# EAGLE board CT_schematic (EAGLE 7.6.0)

Size 100 x 80 mm. Coordinates in mm from the lower left corner, seen from the top.
Outline: 0,0 100,0 100,80 0,80 0,0
Copper layers (1*16): Top 0.035mm / dielectric 1.5mm / Bottom 0.035mm
Design rules "default": minimum track width 10mil, minimum drill 24mil, track to track 8mil, track to pad 8mil, pad to pad 8mil, via to via 8mil, smd to smd 8mil, copper to edge 40mil, drill to drill 8mil, minimum pad ring 10mil, minimum via ring 8mil, stop-mask expansion 4mil, vias tented up to drill 0mil, thermal gap 10mil

## Footprints (pad centres in the part's own frame; a part is rotated, then mirrored left to right if it is on the bottom)
C0603 = smd 0.8 x 0.8: 1 -0.762,0; 2 0.762,0
C0402 = smd 0.5 x 0.5: 1 -0.508,0; 2 0.508,0
C0805 = smd 1.2 x 1.3: 1 -1.016,0; 2 1.016,0
C1206 = smd 1.3 x 1.6: 1 -1.524,0; 2 1.524,0
L0603 = smd 0.8 x 0.8: 1 -0.762,0; 2 0.762,0
DR1040 = smd 1.6 x 3.2: 1 -4.458,0; 2 4.458,0
R0603 = smd 0.8 x 0.8: 1 -0.762,0; 2 0.762,0
WLCSP49 = smd 0.25 x 0.25: A1 -1.2,1.2; A2 -0.8,1.2; A3 -0.4,1.2; A4 0,1.2; A5 0.4,1.2; A6 0.8,1.2; A7 1.2,1.2; B1 -1.2,0.8; B2 -0.8,0.8; B3 -0.4,0.8; B4 0,0.8; B5 0.4,0.8; B6 0.8,0.8; B7 1.2,0.8; C1 -1.2,0.4; C2 -0.8,0.4; C3 -0.4,0.4; C4 0,0.4; C5 0.4,0.4; C6 0.8,0.4; C7 1.2,0.4; D1 -1.2,0; D2 -0.8,0; D3 -0.4,0; D4 0,0; D5 0.4,0; D6 0.8,0; D7 1.2,0; E1 -1.2,-0.4; E2 -0.8,-0.4; E3 -0.4,-0.4; E4 0,-0.4; E5 0.4,-0.4; E6 0.8,-0.4; E7 1.2,-0.4; F1 -1.2,-0.8; F2 -0.8,-0.8; F3 -0.4,-0.8; F4 0,-0.8; F5 0.4,-0.8; F6 0.8,-0.8; F7 1.2,-0.8; G1 -1.2,-1.2; G2 -0.8,-1.2; G3 -0.4,-1.2; G4 0,-1.2; G5 0.4,-1.2; G6 0.8,-1.2; G7 1.2,-1.2
TST-110-05-T-D-RA = drill 1 pad 1.7 square: 1 0,0 | drill 1 pad 1.7: 2 0,2.54; 3 2.54,0; 4 2.54,2.54; 5 5.08,0; 6 5.08,2.54; 7 7.62,0; 8 7.62,2.54; 9 10.16,0; 10 10.16,2.54; 11 12.7,0; 12 12.7,2.54; 13 15.24,0; 14 15.24,2.54; 15 17.78,0; 16 17.78,2.54; 17 20.32,0; 18 20.32,2.54; 19 22.86,0; 20 22.86,2.54
TDFN-8/6MM = smd 0.3 x 0.75: 1 0,0; 2 0.5,0; 3 1,0; 4 1.5,0; 5 1.5,3; 6 1,3; 7 0.5,3; 8 0,3
FCI_10118193-0001LF = smd 0.4 x 1.35: 1 -1.3,2.675; 2 -0.65,2.675; 3 0,2.675; 4 0.65,2.675; 5 1.3,2.675 | smd 1.6 x 1.4: 6 -3.2,2.45; 7 3.2,2.45 | smd 1.9 x 1.9: 8 -1.2,0; 9 1.2,0 | hole 0.5: -3.3,0; 3.3,0
SOT143B = smd 1 x 0.7: 1 -0.75,-1 | smd 0.6 x 0.7: 2 0.95,-1; 3 0.95,1; 4 -0.95,1
ABS07-32.768KHZ-7-T = smd 1.1 x 2.4: 1 -2.5,0; 2 0,0
ASDMB-XX.XXXXMHZ-XX-XX-XXX = smd 0.65 x 0.85: 1 0.45,0.2; 2 2.05,0.2; 3 2.05,1.8; 4 0.45,1.8
TSOT-23-5 = smd 1.3 x 0.62: 1 -1.31,0.95; 2 -1.31,0; 3 -1.31,-0.95; 4 1.31,-0.95; 5 1.31,0.95
DFN8_2X3MC = smd 0.813 x 0.305: 1 -1.398,0.75; 2 -1.398,0.25; 3 -1.398,-0.25; 4 -1.398,-0.75; 5 1.398,-0.75; 6 1.398,-0.25; 7 1.398,0.25; 8 1.398,0.75 | smd 1.753 x 1.549: 9 0,0
JST-2-SMD = smd 1 x 4.6: 1 -1,-3.7; 2 1,-3.7 | smd 1.6 x 3.4: NC1 -3.4,1.5; NC2 3.4,1.5
SON-6 = smd 0.55 x 0.3: 1 -0.355,0.5 | smd 0.52 x 0.3: 2 -0.37,0; 3 -0.37,-0.5; 4 0.37,-0.5; 5 0.37,0; 6 0.37,0.5
SW_4-1437565-2 = smd 1.4 x 2.1: 1 -2.23,4.55; 2 -2.23,-4.55; 3 2.23,4.55; 4 2.23,-4.55
LGM67K-G1J2-24-Z = smd 0.8 x 1.4: A -2,0; C 0,0
NC7SZ125M5X = smd 1.3 x 0.7: 1 -1.3,0.95; 2 -1.3,0; 3 -1.3,-0.95; 4 1.3,-0.95; 5 1.3,0.95

## Placement (x,y rotation side)
C1  1e-06  [C0603]  -53.34,57.15 0 top  (outside the outline)
C2  1e-07  [C0603]  -57.15,57.15 0 top  (outside the outline)
C3  1e-07  [C0603]  -60.96,57.15 0 top  (outside the outline)
C4  1e-07  [C0603]  -15.24,62.23 0 top  (outside the outline)
C5  4.7e-06  [C0603]  -49.53,57.15 0 top  (outside the outline)
C6  1e-07  [C0603]  -19.05,62.23 0 top  (outside the outline)
C7  1e-07  [C0603]  -22.86,62.23 0 top  (outside the outline)
C8  1e-08  [C0603]  -26.67,62.23 0 top  (outside the outline)
C9  1e-06  [C0603]  -30.48,62.23 0 top  (outside the outline)
C10  1e-11  [C0402]  -60.96,62.23 0 top  (outside the outline)
C11  1e-11  [C0402]  -15.24,67.31 0 top  (outside the outline)
C12  1e-07  [C0402]  -19.05,67.31 0 top  (outside the outline)
C13  1e-08  [C0402]  -22.86,67.31 0 top  (outside the outline)
C14  1e-08  [C0402]  -26.67,67.31 0 top  (outside the outline)
C15  1e-05  [C0805]  -21.59,50.8 0 top  (outside the outline)
C16  1e-05  [C0805]  -26.67,50.8 0 top  (outside the outline)
C17  1e-07  [C0402]  -30.48,67.31 0 top  (outside the outline)
C18  1e-05  [C1206]  -48.26,43.18 0 top  (outside the outline)
C19  1e-05  [C1206]  -54.61,43.18 0 top  (outside the outline)
C20  1e-08  [C0402]  -34.29,67.31 0 top  (outside the outline)
C21  1e-08  [C0402]  -38.1,67.31 0 top  (outside the outline)
F1  240.0  [L0603]  -34.29,62.23 0 top  (outside the outline)
I1  5.2e-06  [DR1040]  -44.45,6.35 0 top  (outside the outline)
R1  10000.0  [R0603]  -59.69,50.8 0 top  (outside the outline)
R2  1000.0  [R0603]  -38.1,62.23 0 top  (outside the outline)
R3  910.0  [R0603]  -41.91,62.23 0 top  (outside the outline)
R4  4700.0  [R0603]  -45.72,62.23 0 top  (outside the outline)
R5  2200.0  [R0603]  -49.53,62.23 0 top  (outside the outline)
R6  2200.0  [R0603]  -53.34,62.23 0 top  (outside the outline)
R7  10000.0  [R0603]  -15.24,57.15 0 top  (outside the outline)
R8  10000.0  [R0603]  -20.32,57.15 0 top  (outside the outline)
R9  10000.0  [R0603]  -25.4,57.15 0 top  (outside the outline)
R10  490000.0  [R0603]  -44.45,50.8 0 top  (outside the outline)
R11  1000000.0  [R0603]  -39.37,50.8 0 top  (outside the outline)
R12  10000.0  [R0603]  -30.48,57.15 0 top  (outside the outline)
R13  10000.0  [R0603]  -35.56,57.15 0 top  (outside the outline)
R14  82000.0  [R0603]  -40.64,57.15 0 top  (outside the outline)
R15  300000.0  [R0603]  -49.53,50.8 0 top  (outside the outline)
R16  120000.0  [R0603]  -54.61,50.8 0 top  (outside the outline)
R17  2000.0  [R0603]  -57.15,62.23 0 top  (outside the outline)
R18  10000.0  [R0603]  -45.72,57.15 0 top  (outside the outline)
U1  stm32f078cby6  [WLCSP49]  -59.69,35.56 0 top  (outside the outline)
U2  TST-110-05-T-D-RA  [TST-110-05-T-D-RA]  -46.99,34.29 0 top  (outside the outline)
U3  24AA01T-I/MNY  [TDFN-8/6MM]  -39.37,25.4 0 top  (outside the outline)
U4  10118193-0001LF  [FCI_10118193-0001LF]  -48.26,25.4 0 top  (outside the outline)
U5  prtr5v0u2ax  [SOT143B]  -50.8,67.31 0 top  (outside the outline)
U6  ABS07-32.768KHZ-7-T  [ABS07-32.768KHZ-7-T]  -27.94,44.45 0 top  (outside the outline)
U7  ASDMB-25.000MHZ-EC-T  [ASDMB-XX.XXXXMHZ-XX-XX-XXX]  -16.51,1.27 0 top  (outside the outline)
U8  ltc3406es5  [TSOT-23-5]  -31.75,49.53 0 top  (outside the outline)
U9  MCP73831T-2ACI/MC  [DFN8_2X3MC]  -15.24,71.12 0 top  (outside the outline)
U10  S2B-PH-SM4-TB(LF)(SN)  [JST-2-SMD]  -22.86,27.94 0 top  (outside the outline)
U11  TPS3895ADRYR  [SON-6]  -54.61,66.04 0 top  (outside the outline)
U12  4-1437565-2  [SW_4-1437565-2]  -34.29,6.35 0 top  (outside the outline)
U13  Q65110A2395  [LGM67K-G1J2-24-Z]  -36.83,44.45 0 top  (outside the outline)
U14  nc7sz125m5x  [NC7SZ125M5X]  -59.69,43.18 0 top  (outside the outline)
U15  nc7sz125m5x  [NC7SZ125M5X]  -15.24,50.8 0 top  (outside the outline)

## Library data of the parts
C1-C21 F1 I1 R1-R18 U1-U15 = circuit_tree

## Nets
CLK_CRYSTAL_U1_C6: C10.1 U1.C6 U6.1
CLK_CRYSTAL_U1_C7: C11.1 U1.C7 U6.2
CLK_U1_D7: U1.D7 U7.3
GND: C1.2 C2.2 C3.2 C4.2 C5.2 C6.2 C7.2 C8.2 C9.2 C10.2 C11.2 C12.2 C13.2 C14.2 C15.2 C16.1 C16.2 C17.2 C18.2 C19.2 C20.2 C21.2 R2.2 R7.2 R8.2 R10.2 R14.2 R16.2 R17.2 U1.A6 U1.B1 U1.D3 U1.E6 U2.4 U2.6 U2.8 U2.10 U2.12 U2.14 U2.16 U2.18 U2.20 U3.4 U3.7 U4.5 U4.6 U4.7 U4.8 U4.9 U5.1 U7.2 U8.2 U9.6 U9.9 U10.2 U11.2 U13.C U14.2 U14.3 U15.1 U15.3
INPUT_USBPOWER_5V: C18.1 R18.2 U4.1 U5.4 U9.1 U9.2
NET_U1_A5: R7.1 U1.A5
NET_U1_B5: R5.1 U1.B5 U3.6
NET_U1_C5: R6.1 U1.C5 U3.5
NET_U1_E7: R4.1 U1.E7 U15.4
NET_U1_F7: C8.1 C9.1 F1.1 U1.F7
NET_U1_G3: R8.1 U1.G3
NET_U1_G6: R3.1 U1.G6 U13.A
NET_U1_G7: R1.1 U1.G7 U12.3 U12.4
NET_U8_1: U8.1
NET_U8_3: I1.1 U8.3
NET_U8_5: R10.1 R11.1 U8.5
NET_U8_ATNET_3: I1.2 R11.2
NET_U9_5: R18.1 U9.5
NET_U9_8: R17.1 U9.8
NET_U11_1: R13.1 R14.1 U11.1
NET_U11_3: R15.2 R16.1 U11.3
NET_U11_4: R12.1 U11.4 U14.4 U15.2
NET_U12_1: R2.1 U12.1 U12.2
PROC_SYS_SWCLK: U1.A1 U2.9
PROC_SYS_SWDIO: U1.B3 U2.7
PROC_USB_DM: U1.C1 U4.2 U5.3
PROC_USB_DP: U1.C3 U4.3 U5.2
RST_OUT_U2_SRESET_B: R9.1 U2.15 U14.1
VCC_S1_3V7: C15.1 C19.1 U8.4 U9.3 U9.4 U10.1
VCC_TIER1_1V8: C1.1 C2.1 C3.1 C4.1 C5.1 C6.1 C7.1 C12.1 C13.1 C14.1 C16.2 C17.1 C20.1 C21.1 F1.2 I1.2 R1.2 R3.2 R4.2 R5.2 R6.2 R9.2 R11.2 R12.2 R13.2 R15.1 U1.A7 U1.B2 U1.B7 U1.F2 U2.1 U3.8 U7.4 U11.6 U14.5 U15.5

## Tracks (layer width: path | path; a pad name or v marks a point on that pad's centre or on a via)
CLK_CRYSTAL_U1_C6  (2 unrouted)
CLK_CRYSTAL_U1_C7  (2 unrouted)
CLK_U1_D7  (1 unrouted)
GND  (60 unrouted)
INPUT_USBPOWER_5V  (5 unrouted)
NET_U1_A5  (1 unrouted)
NET_U1_B5  (2 unrouted)
NET_U1_C5  (2 unrouted)
NET_U1_E7  (2 unrouted)
NET_U1_F7  (3 unrouted)
NET_U1_G3  (1 unrouted)
NET_U1_G6  (2 unrouted)
NET_U1_G7  (3 unrouted)
NET_U8_3  (1 unrouted)
NET_U8_5  (2 unrouted)
NET_U8_ATNET_3  (1 unrouted)
NET_U9_5  (1 unrouted)
NET_U9_8  (1 unrouted)
NET_U11_1  (2 unrouted)
NET_U11_3  (2 unrouted)
NET_U11_4  (3 unrouted)
NET_U12_1  (2 unrouted)
PROC_SYS_SWCLK  (1 unrouted)
PROC_SYS_SWDIO  (1 unrouted)
PROC_USB_DM  (2 unrouted)
PROC_USB_DP  (2 unrouted)
RST_OUT_U2_SRESET_B  (2 unrouted)
VCC_S1_3V7  (5 unrouted)
VCC_TIER1_1V8  (35 unrouted)